# EAGLE board Coe_group8_Circuit (EAGLE 9.7.0)

Size 242.46 x 137.28 mm. Coordinates in mm from the lower left corner, seen from the top.
Outline: 0,0 242.46,0 242.46,137.28 0,137.28 0,0
Copper layers (1*16): Top 0.035mm / dielectric 1.5mm / Bottom 0.035mm
Design rules "default": minimum track width 6mil, minimum drill 0.35mm, track to track 6mil, track to pad 6mil, pad to pad 6mil, via to via 6mil, smd to smd 6mil, copper to edge 40mil, drill to drill 6mil, minimum pad ring 10mil, minimum via ring 8mil, stop-mask expansion 4mil, vias tented up to drill 0mil, thermal gap 10mil

## Footprints (pad centres in the part's own frame; a part is rotated, then mirrored left to right if it is on the bottom)
PIEZO = drill 1 pad 1.6: 1 -3.5,0; 2 3.5,0
RESAD1016W63L850D250B = drill 0.83 pad 1.43: 1 -5.08,0; 2 5.08,0
ARDUINO-UNO-R3-SHIELD = drill 1.016 pad 1.88: 3.3V 24.13,-2.54; 5V 24.13,0; A0 24.13,12.7; A1 24.13,15.24; A2 24.13,17.78; A3 24.13,20.32; A4 24.13,22.86; A5 24.13,25.4; AREF -24.13,-13.97; D2 -24.13,20.32; D3 -24.13,17.78; D4 -24.13,15.24; D5 -24.13,12.7; D6 -24.13,10.16; D7 -24.13,7.62; D8 -24.13,3.81; D9 -24.13,1.27; D10 -24.13,-1.27; D11 -24.13,-3.81; D12 -24.13,-6.35; D13 -24.13,-8.89; GND@0 24.13,2.54; GND@1 24.13,5.08; GND@2 -24.13,-11.43; IOREF 24.13,-7.62; NC 24.13,-10.16; RES 24.13,-5.08; RX -24.13,25.4; SCL -24.13,-19.05; SDA -24.13,-16.51; TX -24.13,22.86; VIN 24.13,7.62
LCD-I2C = drill 1.016 long: 1 -19.05,-5.08; 2 -19.05,-7.62; 3 -19.05,-10.16; 4 -19.05,-12.7

## Placement (x,y rotation side)
PIEZO1  PIEZO  [PIEZO]  186.76,103.15 0 top
R1  220  [RESAD1016W63L850D250B]  185.49,95.53 180 top
U1  ARDUINO-UNO-R3-SHIELD  [ARDUINO-UNO-R3-SHIELD]  47.88,107.43 270 top
ULCD_1  LCD-16X2-I2CSUNFOUNDER-IIC  [LCD-I2C]  53.29,36.63 0 top
ULCD_2  LCD-16X2-I2CSUNFOUNDER-IIC  [LCD-I2C]  186.84,37.68 0 top

## Library data of the parts
PIEZO1 R1 U1 ULCD_1 ULCD_2 = Tinkercad

## Nets
PIEZO1_1: PIEZO1.1 R1.2
U1_5V: U1.5V ULCD_1.2 ULCD_2.2
U1_A4: U1.A4 ULCD_1.3 ULCD_2.3
U1_A5: U1.A5 ULCD_1.4 ULCD_2.4
U1_D8: R1.1 U1.D8
U1_GND: PIEZO1.2 U1.GND@0 U1.GND@1 U1.GND@2 ULCD_1.1 ULCD_2.1

## Tracks (layer width: path | path; a pad name or v marks a point on that pad's centre or on a via)
PIEZO1_1  (1 unrouted)
U1_5V  (2 unrouted)
U1_A4  (2 unrouted)
U1_A5  (2 unrouted)
U1_D8  (1 unrouted)
U1_GND  (5 unrouted)